# EAGLE board 10x10_printout (EAGLE 7.2.0)
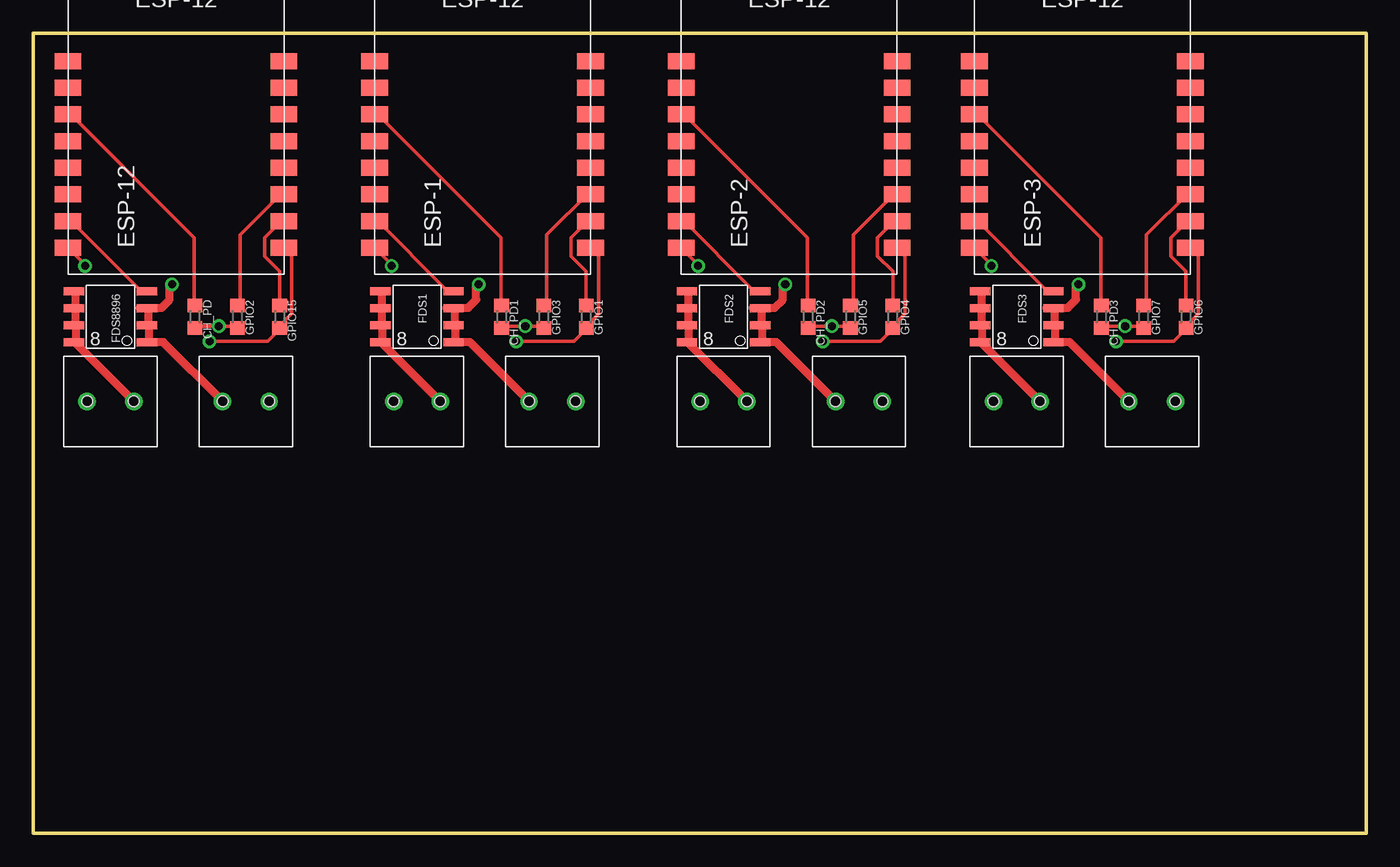
[diagram p0: board, top side]
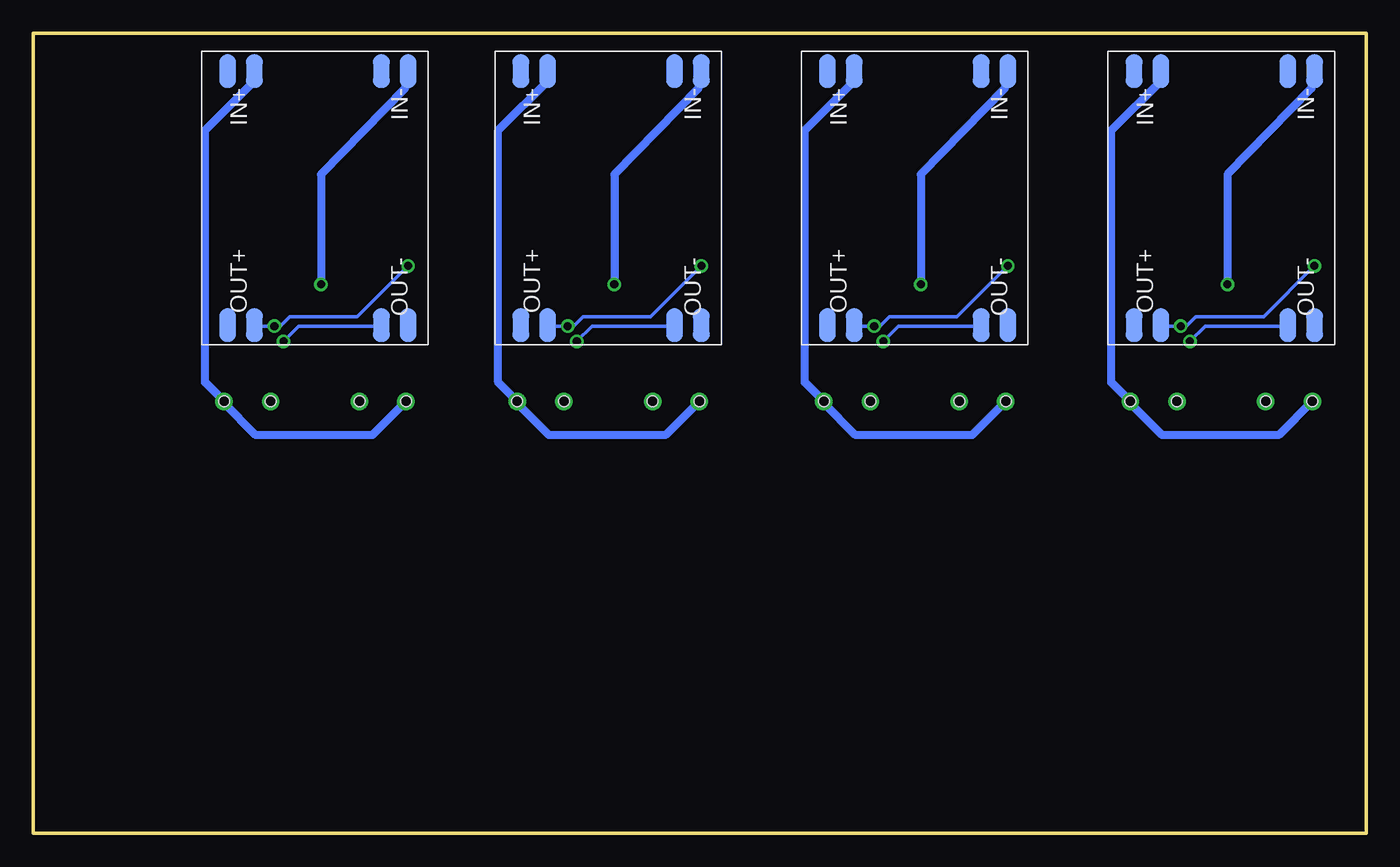
[diagram p1: board, bottom side, seen from below]

Size 100 x 60 mm. Coordinates in mm from the lower left corner, seen from the top.
Outline: 0,0 0,60 100,60 100,0 0,0
Copper layers (1*16): Top 0.035mm / dielectric 1.5mm / Bottom 0.035mm
Design rules "default": minimum track width 10mil, minimum drill 24mil, track to track 8mil, track to pad 8mil, pad to pad 8mil, via to via 8mil, smd to smd 8mil, copper to edge 40mil, drill to drill 8mil, minimum pad ring 10mil, minimum via ring 8mil, stop-mask expansion 4mil, vias tented up to drill 0mil, thermal gap 10mil

## Footprints (pad centres in the part's own frame; a part is rotated, then mirrored left to right if it is on the bottom)
KF350-2P = drill 0.8: 1 -1.75,0; 2 1.75,0 | hole 0.8: -1.75,0; 1.75,0
R0603 = smd 1 x 1.1: 1 -0.85,0; 2 0.85,0
ESP8266-ESP12 = smd 2 x 1.2: 1 16.2,2; 2 16.2,4; 3 16.2,6; 4 16.2,8; 5 16.2,10; 6 16.2,12; 7 16.2,14; 8 16.2,16; 9 0,16; 10 0,14; 11 0,12; 12 0,10; 13 0,8; 14 0,6; 15 0,4; 16 0,2
SO-8 = smd 1.524 x 0.61: 1 -2.743,1.905; 2 -2.743,0.635; 3 -2.743,-0.635; 4 -2.743,-1.905; 5 2.743,-1.905; 6 2.743,-0.635; 7 2.743,0.635; 8 2.743,1.905
CN1594 = smd 2.54 x 1.27: IN+(1) -9.525,-4.547; IN+(2) -9.525,-6.553; IN-(1) -9.525,6.985; IN-(2) -9.525,4.978; OUT+(1) 9.525,-4.547; OUT+(2) 9.525,-6.553; OUT-(1) 9.525,6.985; OUT-(2) 9.525,4.978

## Placement (x,y rotation side)
12V_IN  KF350-P2  [KF350-2P]  15.95,32.4 0 top
12V_IN1  KF350-P2  [KF350-2P]  38.95,32.4 0 top
12V_IN2  KF350-P2  [KF350-2P]  61.95,32.4 0 top
12V_IN3  KF350-P2  [KF350-2P]  83.94,32.4 0 top
CH_PD  10k  [R0603]  12.13,38.75 270 top
CH_PD1  10k  [R0603]  35.13,38.75 270 top
CH_PD2  10k  [R0603]  58.13,38.75 270 top
CH_PD3  10k  [R0603]  80.14,38.75 270 top
ESP-1  ESP8266_ESP-12  [ESP8266-ESP12]  25.61,41.92 0 top
ESP-2  ESP8266_ESP-12  [ESP8266-ESP12]  48.61,41.92 0 top
ESP-3  ESP8266_ESP-12  [ESP8266-ESP12]  70.61,41.92 0 top
ESP-12  ESP8266_ESP-12  [ESP8266-ESP12]  2.61,41.92 0 top
FDS1  [SO-8]  28.79,38.75 180 top
FDS2  [SO-8]  51.78,38.75 180 top
FDS3  [SO-8]  73.78,38.75 180 top
FDS8896  [SO-8]  5.79,38.75 180 top
GPIO1  10k  [R0603]  41.48,38.75 270 top
GPIO2  10k  [R0603]  15.31,38.75 270 top
GPIO3  10k  [R0603]  38.31,38.75 270 top
GPIO4  10k  [R0603]  64.48,38.75 270 top
GPIO5  10k  [R0603]  61.31,38.75 270 top
GPIO6  10k  [R0603]  86.48,38.75 270 top
GPIO7  10k  [R0603]  83.31,38.75 270 top
GPIO15  10k  [R0603]  18.48,38.75 270 top
LED  KF350-P2  [KF350-2P]  5.79,32.4 0 top
LED1  KF350-P2  [KF350-2P]  28.79,32.4 0 top
LED2  KF350-P2  [KF350-2P]  51.78,32.4 0 top
LED3  KF350-P2  [KF350-2P]  73.78,32.4 0 top
U$1  CN1594THROUGH-HOLE  [CN1594]  33.87,47.64 270 bottom
U$2  CN1594THROUGH-HOLE  [CN1594]  10.87,47.64 270 bottom
U$3  CN1594THROUGH-HOLE  [CN1594]  56.87,47.64 270 bottom
U$4  CN1594THROUGH-HOLE  [CN1594]  78.86,47.64 270 bottom

## Library data of the parts
12V_IN 12V_IN1-12V_IN3 LED LED1-LED3 = KF350-P2
CH_PD CH_PD1-CH_PD3 GPIO1-GPIO7 GPIO15 = rcl
ESP-1-ESP-3 ESP-12 = ESP8266-ESP12
FDS1-FDS3 FDS8896 = transistor-fet
U$1-U$4 = CN1594_smd

## Nets
N$1: CH_PD.2 ESP-12.16 GPIO2.2 U$2.OUT+(1)
N$2: CH_PD.1 ESP-12.11
N$3: ESP-12.3 GPIO2.1
N$4: FDS8896.5 FDS8896.6 FDS8896.7 FDS8896.8 LED.2
N$5: CH_PD1.2 ESP-1.16 GPIO3.2 U$1.OUT+(1)
N$6: ESP-12.1 GPIO15.2 U$2.OUT-(2)
N$7: ESP-12.2 GPIO15.1
N$8: CH_PD1.1 ESP-1.11
N$9: ESP-1.3 GPIO3.1
N$10: 12V_IN.1 FDS8896.1 FDS8896.2 FDS8896.3 U$2.IN-(1)
N$11: ESP-12.15 FDS8896.4
N$12: 12V_IN.2 LED.1 U$2.IN+(1)
N$13: ESP-1.1 GPIO1.2 U$1.OUT-(2)
N$14: ESP-1.2 GPIO1.1
N$15: FDS1.5 FDS1.6 FDS1.7 FDS1.8 LED1.2
N$16: ESP-1.15 FDS1.4
N$17: 12V_IN1.1 FDS1.1 FDS1.2 FDS1.3 U$1.IN-(1)
N$18: 12V_IN1.2 LED1.1 U$1.IN+(1)
N$19: CH_PD2.2 ESP-2.16 GPIO5.2 U$3.OUT+(1)
N$20: CH_PD2.1 ESP-2.11
N$21: ESP-2.3 GPIO5.1
N$22: ESP-2.1 GPIO4.2 U$3.OUT-(2)
N$23: ESP-2.2 GPIO4.1
N$24: FDS2.5 FDS2.6 FDS2.7 FDS2.8 LED2.2
N$25: ESP-2.15 FDS2.4
N$26: 12V_IN2.1 FDS2.1 FDS2.2 FDS2.3 U$3.IN-(1)
N$27: 12V_IN2.2 LED2.1 U$3.IN+(1)
N$28: CH_PD3.2 ESP-3.16 GPIO7.2 U$4.OUT+(1)
N$29: CH_PD3.1 ESP-3.11
N$30: ESP-3.3 GPIO7.1
N$31: ESP-3.1 GPIO6.2 U$4.OUT-(2)
N$32: ESP-3.2 GPIO6.1
N$33: FDS3.5 FDS3.6 FDS3.7 FDS3.8 LED3.2
N$34: ESP-3.15 FDS3.4
N$35: 12V_IN3.1 FDS3.1 FDS3.2 FDS3.3 U$4.IN-(1)
N$36: 12V_IN3.2 LED3.1 U$4.IN+(1)

## Tracks (layer width: path | path; a pad name or v marks a point on that pad's centre or on a via)
N$1  (via drill 0.6, 0.61)
  Top 0.254: CH_PD.2 12.31,38.04 v13.91,38.04 15.29,38.04 GPIO2.2 | ESP-12.16 3.88,42.66 v3.88,42.56
  Bottom 0.254: U$2.OUT+(1) 15.29,38.04 v13.91,38.04 13.48,38.04 12.77,38.75 7.69,38.75 v3.88,42.56
N$2
  Top 0.254: CH_PD.1 12.08,39.64 12.08,44.67 2.71,54.04 ESP-12.11
N$3
  Top 0.254: GPIO2.1 15.51,39.64 15.51,44.9 18.71,48.1 ESP-12.3
N$4
  Top 0.254: 3.17,36.9 FDS8896.8 | 3.17,38.04 FDS8896.7 3.17,38.27 | 3.17,39.18 FDS8896.6 3.17,39.41 | 3.17,40.55 FDS8896.5
  Top 0.61: 3.17,38.04 3.17,36.9 | 3.17,38.27 3.17,39.18 | 3.17,39.41 3.17,40.55 | LED.2 3.09,36.84 FDS8896.8
N$5  (via drill 0.6, 0.61)
  Top 0.254: CH_PD1.2 35.31,38.04 v36.91,38.04 38.28,38.04 GPIO3.2 | ESP-1.16 26.88,42.66 v26.88,42.56
  Bottom 0.254: U$1.OUT+(1) 38.28,38.04 v36.91,38.04 36.48,38.04 35.77,38.75 30.69,38.75 v26.88,42.56
N$6  (via drill 0.61)
  Top 0.254: ESP-12.1 18.94,43.75 19.4,43.3 19.4,38.95 18.48,38.04 GPIO15.2 18.48,37.81 17.57,36.9 v13.23,36.9
  Bottom 0.254: v13.23,36.9 12.08,38.04 5.91,38.04 U$2.OUT-(2)
N$7
  Top 0.254: GPIO15.1 18.48,42.15 17.34,43.3 17.34,44.67 18.71,46.04 ESP-12.2
N$8
  Top 0.254: CH_PD1.1 35.08,39.64 35.08,44.67 25.71,54.04 ESP-1.11
N$9
  Top 0.254: GPIO3.1 38.51,39.64 38.51,44.9 41.71,48.1 ESP-1.3
N$10  (via drill 0.61)
  Top 0.254: 8.65,36.9 FDS8896.1 | 8.65,38.04 FDS8896.2 8.65,38.27 | 8.65,39.18 FDS8896.3 8.43,39.41 7.97,39.41
  Top 0.61: 8.65,38.04 8.65,36.9 | 8.65,38.27 8.65,39.18 | 12V_IN.1 9.75,36.84 FDS8896.1 | 7.97,39.41 9.62,39.41 10.23,40.02 10.23,40.99 v10.41,41.17
  Bottom 0.254: 4.08,57.01 U$2.IN-(1)
  Bottom 0.61: 4.08,57.01 4.11,55.86 10.41,49.41 v10.41,41.17
N$11
  Top 0.254: FDS8896.4 8.43,40.78 7.97,40.78 2.71,46.04 ESP-12.15
N$12
  Bottom 0.61: U$2.IN+(1) 15.41,56.63 15.31,56.53 19.12,52.72 19.12,33.83 12V_IN.2 17.7,32.24 15.31,29.86 6.58,29.86 LED.1
N$13  (via drill 0.61)
  Top 0.254: ESP-1.1 41.94,43.75 42.4,43.3 42.4,38.95 41.48,38.04 GPIO1.2 41.48,37.81 40.57,36.9 v36.23,36.9
  Bottom 0.254: v36.23,36.9 35.08,38.04 28.91,38.04 U$1.OUT-(2)
N$14
  Top 0.254: GPIO1.1 41.48,42.15 40.34,43.3 40.34,44.67 41.71,46.04 ESP-1.2
N$15
  Top 0.254: 26.17,36.9 FDS1.8 | 26.17,38.04 FDS1.7 26.17,38.27 | 26.17,39.18 FDS1.6 26.17,39.41 | 26.17,40.55 FDS1.5
  Top 0.61: 26.17,38.04 26.17,36.9 | 26.17,38.27 26.17,39.18 | 26.17,39.41 26.17,40.55 | LED1.2 26.09,36.84 FDS1.8
N$16
  Top 0.254: FDS1.4 31.43,40.78 30.97,40.78 25.71,46.04 ESP-1.15
N$17  (via drill 0.61)
  Top 0.254: 31.66,36.9 FDS1.1 | 31.66,38.04 FDS1.2 31.66,38.27 | 31.66,39.18 FDS1.3 31.43,39.41 30.97,39.41
  Top 0.61: 31.66,38.04 31.66,36.9 | 31.66,38.27 31.66,39.18 | 12V_IN1.1 32.75,36.84 FDS1.1 | 30.97,39.41 32.62,39.41 33.23,40.02 33.23,40.99 v33.41,41.17
  Bottom 0.254: 27.08,57.01 U$1.IN-(1)
  Bottom 0.61: 27.08,57.01 27.11,55.86 33.41,49.41 v33.41,41.17
N$18
  Bottom 0.61: U$1.IN+(1) 38.41,56.63 38.31,56.53 42.12,52.72 42.12,33.83 12V_IN1.2 40.7,32.24 38.31,29.86 29.57,29.86 LED1.1
N$19  (via drill 0.6, 0.61)
  Top 0.254: CH_PD2.2 58.31,38.04 v59.91,38.04 61.28,38.04 GPIO5.2 | ESP-2.16 49.88,42.66 v49.88,42.56
  Bottom 0.254: U$3.OUT+(1) 61.28,38.04 v59.91,38.04 59.48,38.04 58.77,38.75 53.69,38.75 v49.88,42.56
N$20
  Top 0.254: CH_PD2.1 58.08,39.64 58.08,44.67 48.71,54.04 ESP-2.11
N$21
  Top 0.254: GPIO5.1 61.51,39.64 61.51,44.9 64.71,48.1 ESP-2.3
N$22  (via drill 0.61)
  Top 0.254: ESP-2.1 64.94,43.75 65.4,43.3 65.4,38.95 64.48,38.04 GPIO4.2 64.48,37.81 63.57,36.9 v59.23,36.9
  Bottom 0.254: v59.23,36.9 58.08,38.04 51.91,38.04 U$3.OUT-(2)
N$23
  Top 0.254: GPIO4.1 64.48,42.15 63.34,43.3 63.34,44.67 64.71,46.04 ESP-2.2
N$24
  Top 0.254: 49.17,36.9 FDS2.8 | 49.17,38.04 FDS2.7 49.17,38.27 | 49.17,39.18 FDS2.6 49.17,39.41 | 49.17,40.55 FDS2.5
  Top 0.61: 49.17,38.04 49.17,36.9 | 49.17,38.27 49.17,39.18 | 49.17,39.41 49.17,40.55 | LED2.2 49.09,36.84 FDS2.8
N$25
  Top 0.254: FDS2.4 54.43,40.78 53.97,40.78 48.71,46.04 ESP-2.15
N$26  (via drill 0.61)
  Top 0.254: 54.66,36.9 FDS2.1 | 54.66,38.04 FDS2.2 54.66,38.27 | 54.66,39.18 FDS2.3 54.43,39.41 53.97,39.41
  Top 0.61: 54.66,38.04 54.66,36.9 | 54.66,38.27 54.66,39.18 | 12V_IN2.1 55.75,36.84 FDS2.1 | 53.97,39.41 55.62,39.41 56.23,40.02 56.23,40.99 v56.41,41.17
  Bottom 0.254: 50.08,57.01 U$3.IN-(1)
  Bottom 0.61: 50.08,57.01 50.11,55.86 56.41,49.41 v56.41,41.17
N$27
  Bottom 0.61: U$3.IN+(1) 61.41,56.63 61.31,56.53 65.12,52.72 65.12,33.83 12V_IN2.2 63.7,32.24 61.31,29.86 52.58,29.86 LED2.1
N$28  (via drill 0.6, 0.61)
  Top 0.254: CH_PD3.2 80.31,38.04 v81.91,38.04 83.28,38.04 GPIO7.2 | ESP-3.16 71.88,42.66 v71.88,42.56
  Bottom 0.254: U$4.OUT+(1) 83.28,38.04 v81.91,38.04 81.48,38.04 80.77,38.75 75.69,38.75 v71.88,42.56
N$29
  Top 0.254: CH_PD3.1 80.08,39.64 80.08,44.67 70.71,54.04 ESP-3.11
N$30
  Top 0.254: GPIO7.1 83.51,39.64 83.51,44.9 86.71,48.1 ESP-3.3
N$31  (via drill 0.61)
  Top 0.254: ESP-3.1 86.94,43.75 87.4,43.3 87.4,38.95 86.48,38.04 GPIO6.2 86.48,37.81 85.57,36.9 v81.23,36.9
  Bottom 0.254: v81.23,36.9 80.08,38.04 73.91,38.04 U$4.OUT-(2)
N$32
  Top 0.254: GPIO6.1 86.48,42.15 85.34,43.3 85.34,44.67 86.71,46.04 ESP-3.2
N$33
  Top 0.254: 71.17,36.9 FDS3.8 | 71.17,38.04 FDS3.7 71.17,38.27 | 71.17,39.18 FDS3.6 71.17,39.41 | 71.17,40.55 FDS3.5
  Top 0.61: 71.17,38.04 71.17,36.9 | 71.17,38.27 71.17,39.18 | 71.17,39.41 71.17,40.55 | LED3.2 71.09,36.84 FDS3.8
N$34
  Top 0.254: FDS3.4 76.43,40.78 75.97,40.78 70.71,46.04 ESP-3.15
N$35  (via drill 0.61)
  Top 0.254: 76.66,36.9 FDS3.1 | 76.66,38.04 FDS3.2 76.66,38.27 | 76.66,39.18 FDS3.3 76.43,39.41 75.97,39.41
  Top 0.61: 76.66,38.04 76.66,36.9 | 76.66,38.27 76.66,39.18 | 12V_IN3.1 77.75,36.84 FDS3.1 | 75.97,39.41 77.62,39.41 78.23,40.02 78.23,40.99 v78.41,41.17
  Bottom 0.254: 72.08,57.01 U$4.IN-(1)
  Bottom 0.61: 72.08,57.01 72.11,55.86 78.41,49.41 v78.41,41.17
N$36
  Bottom 0.61: U$4.IN+(1) 83.41,56.63 83.31,56.53 87.12,52.72 87.12,33.83 12V_IN3.2 85.69,32.24 83.31,29.86 74.58,29.86 LED3.1